# Altium PCB PCB2.PcbDoc (part 1 of 2)
Units mm, origin at the board's own origin, x right, y up, seen from the top; angles counter-clockwise.
Board outline 112.5 x 128.5 mm, 2 copper layers (Top Layer, Bottom Layer); 192 components, 158 nets, 643 pads, 146 vias.
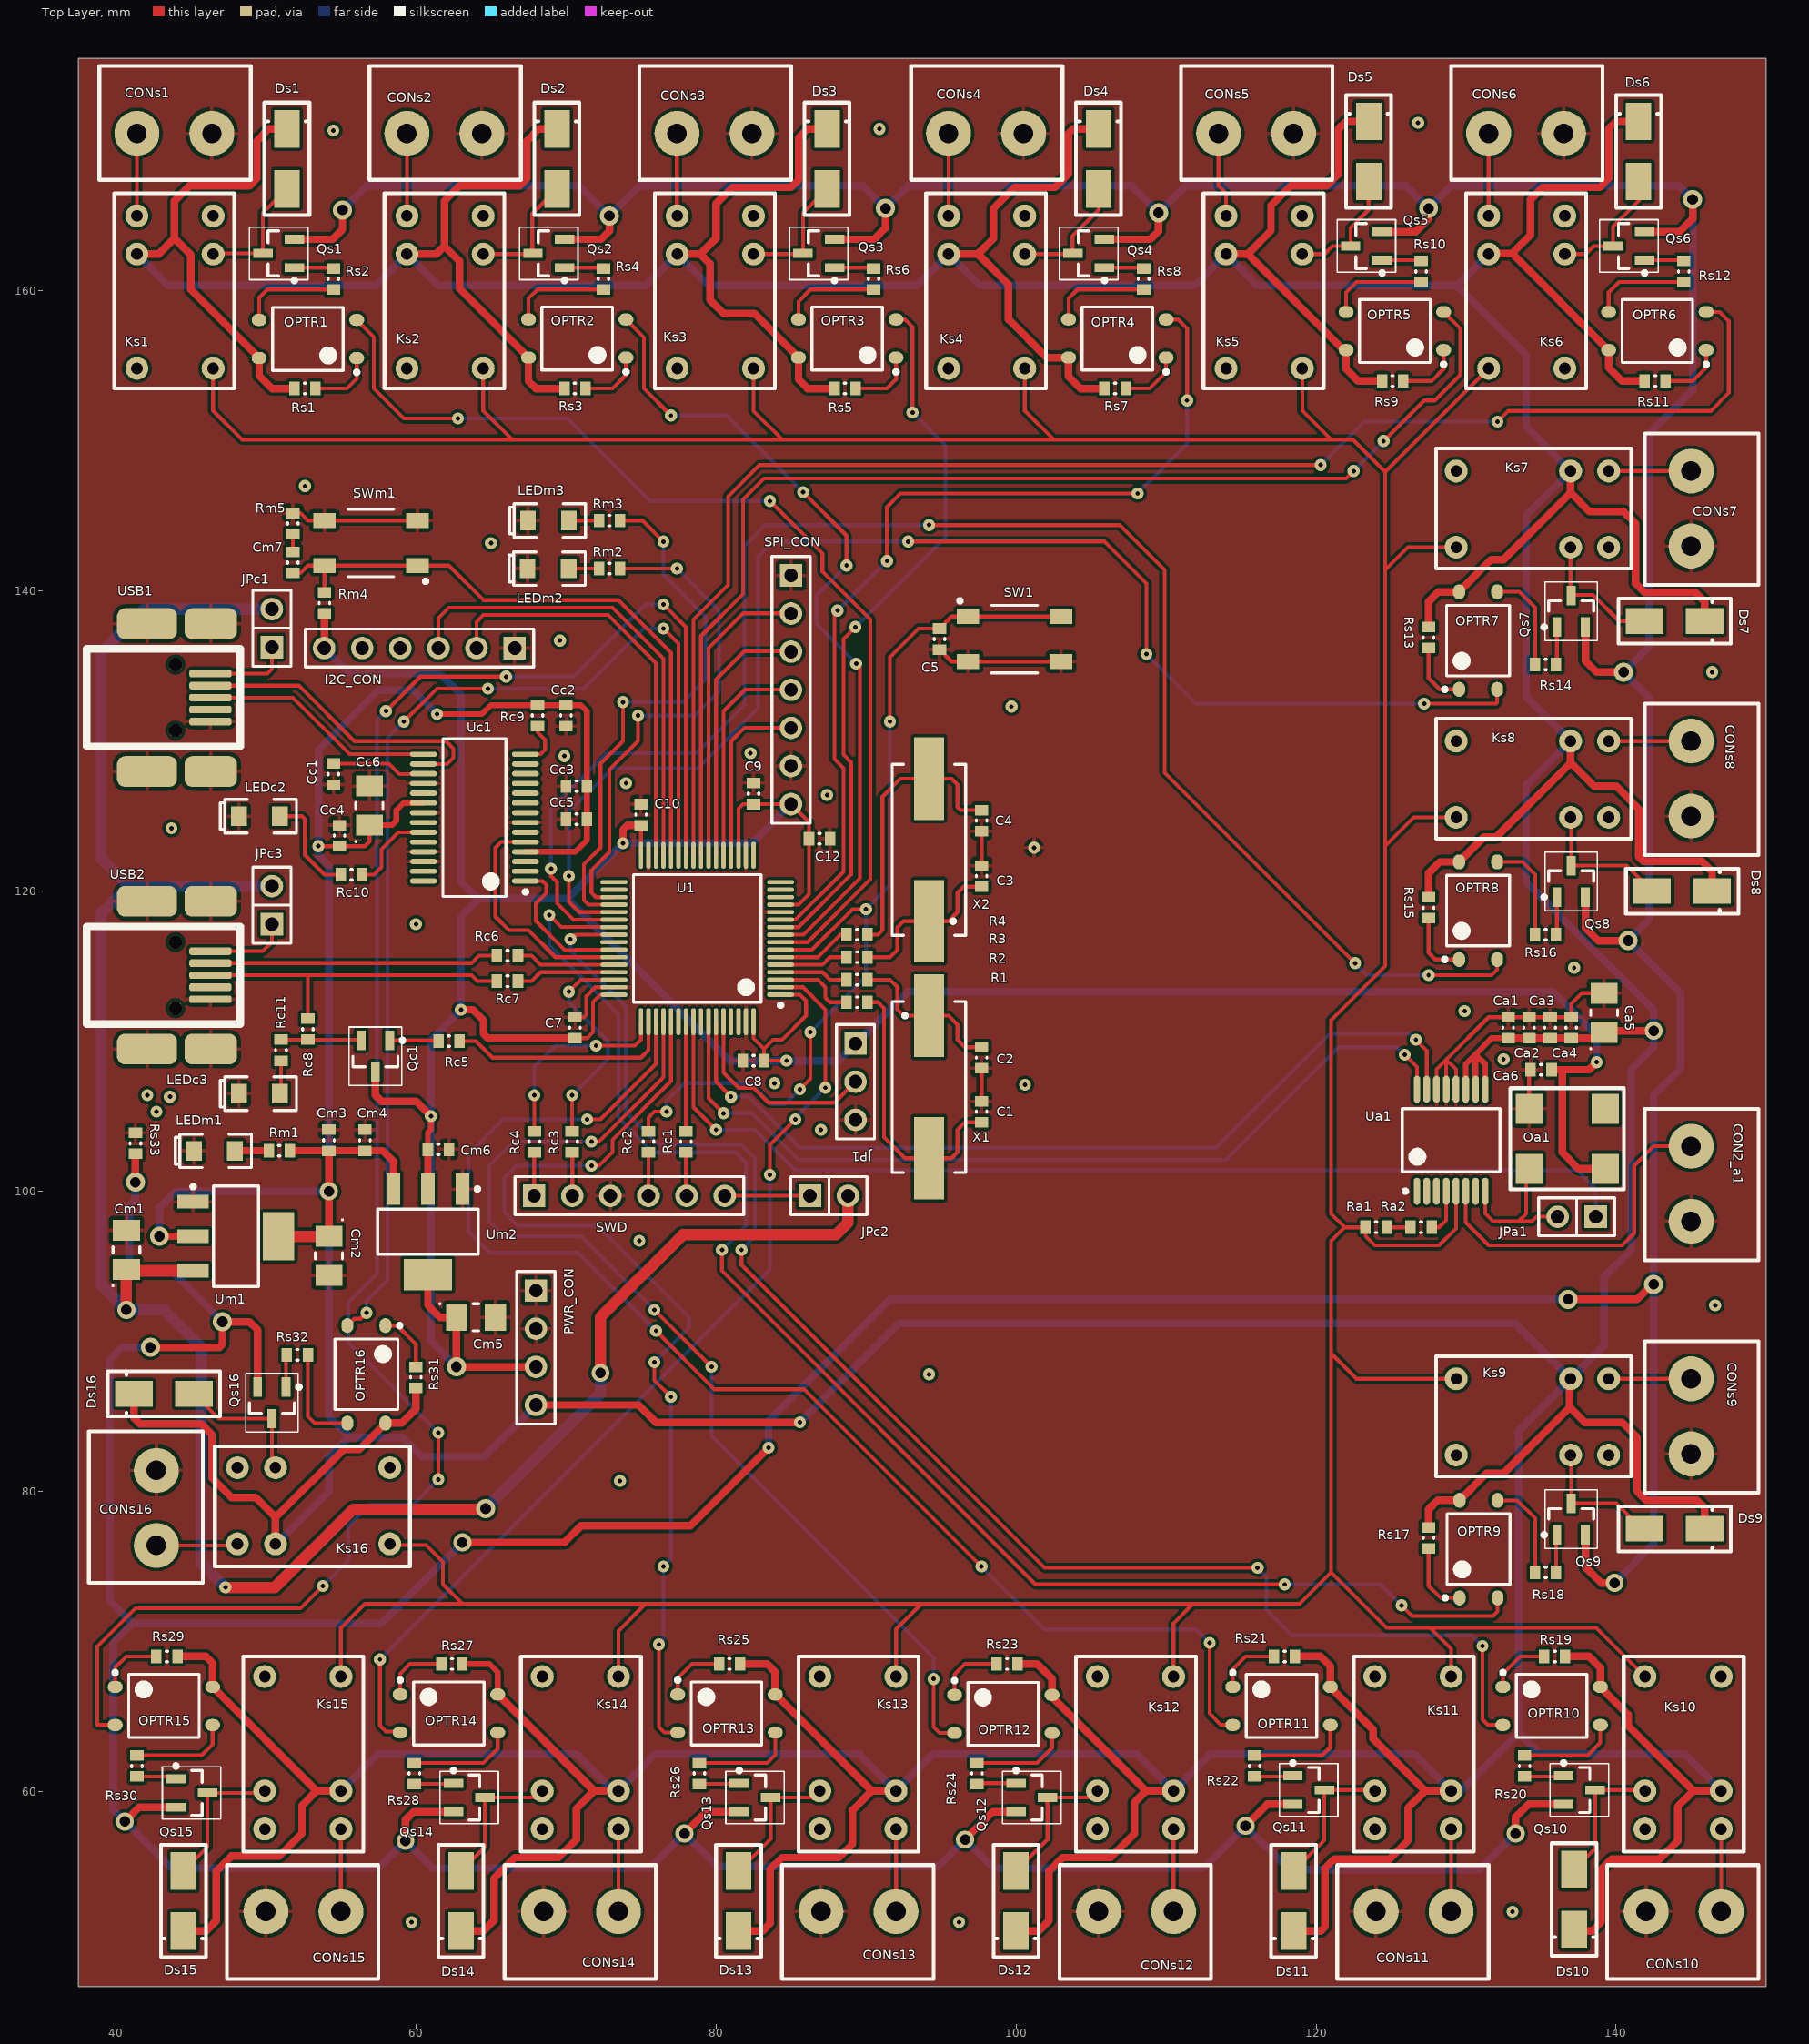
[diagram p0: Top Layer view]
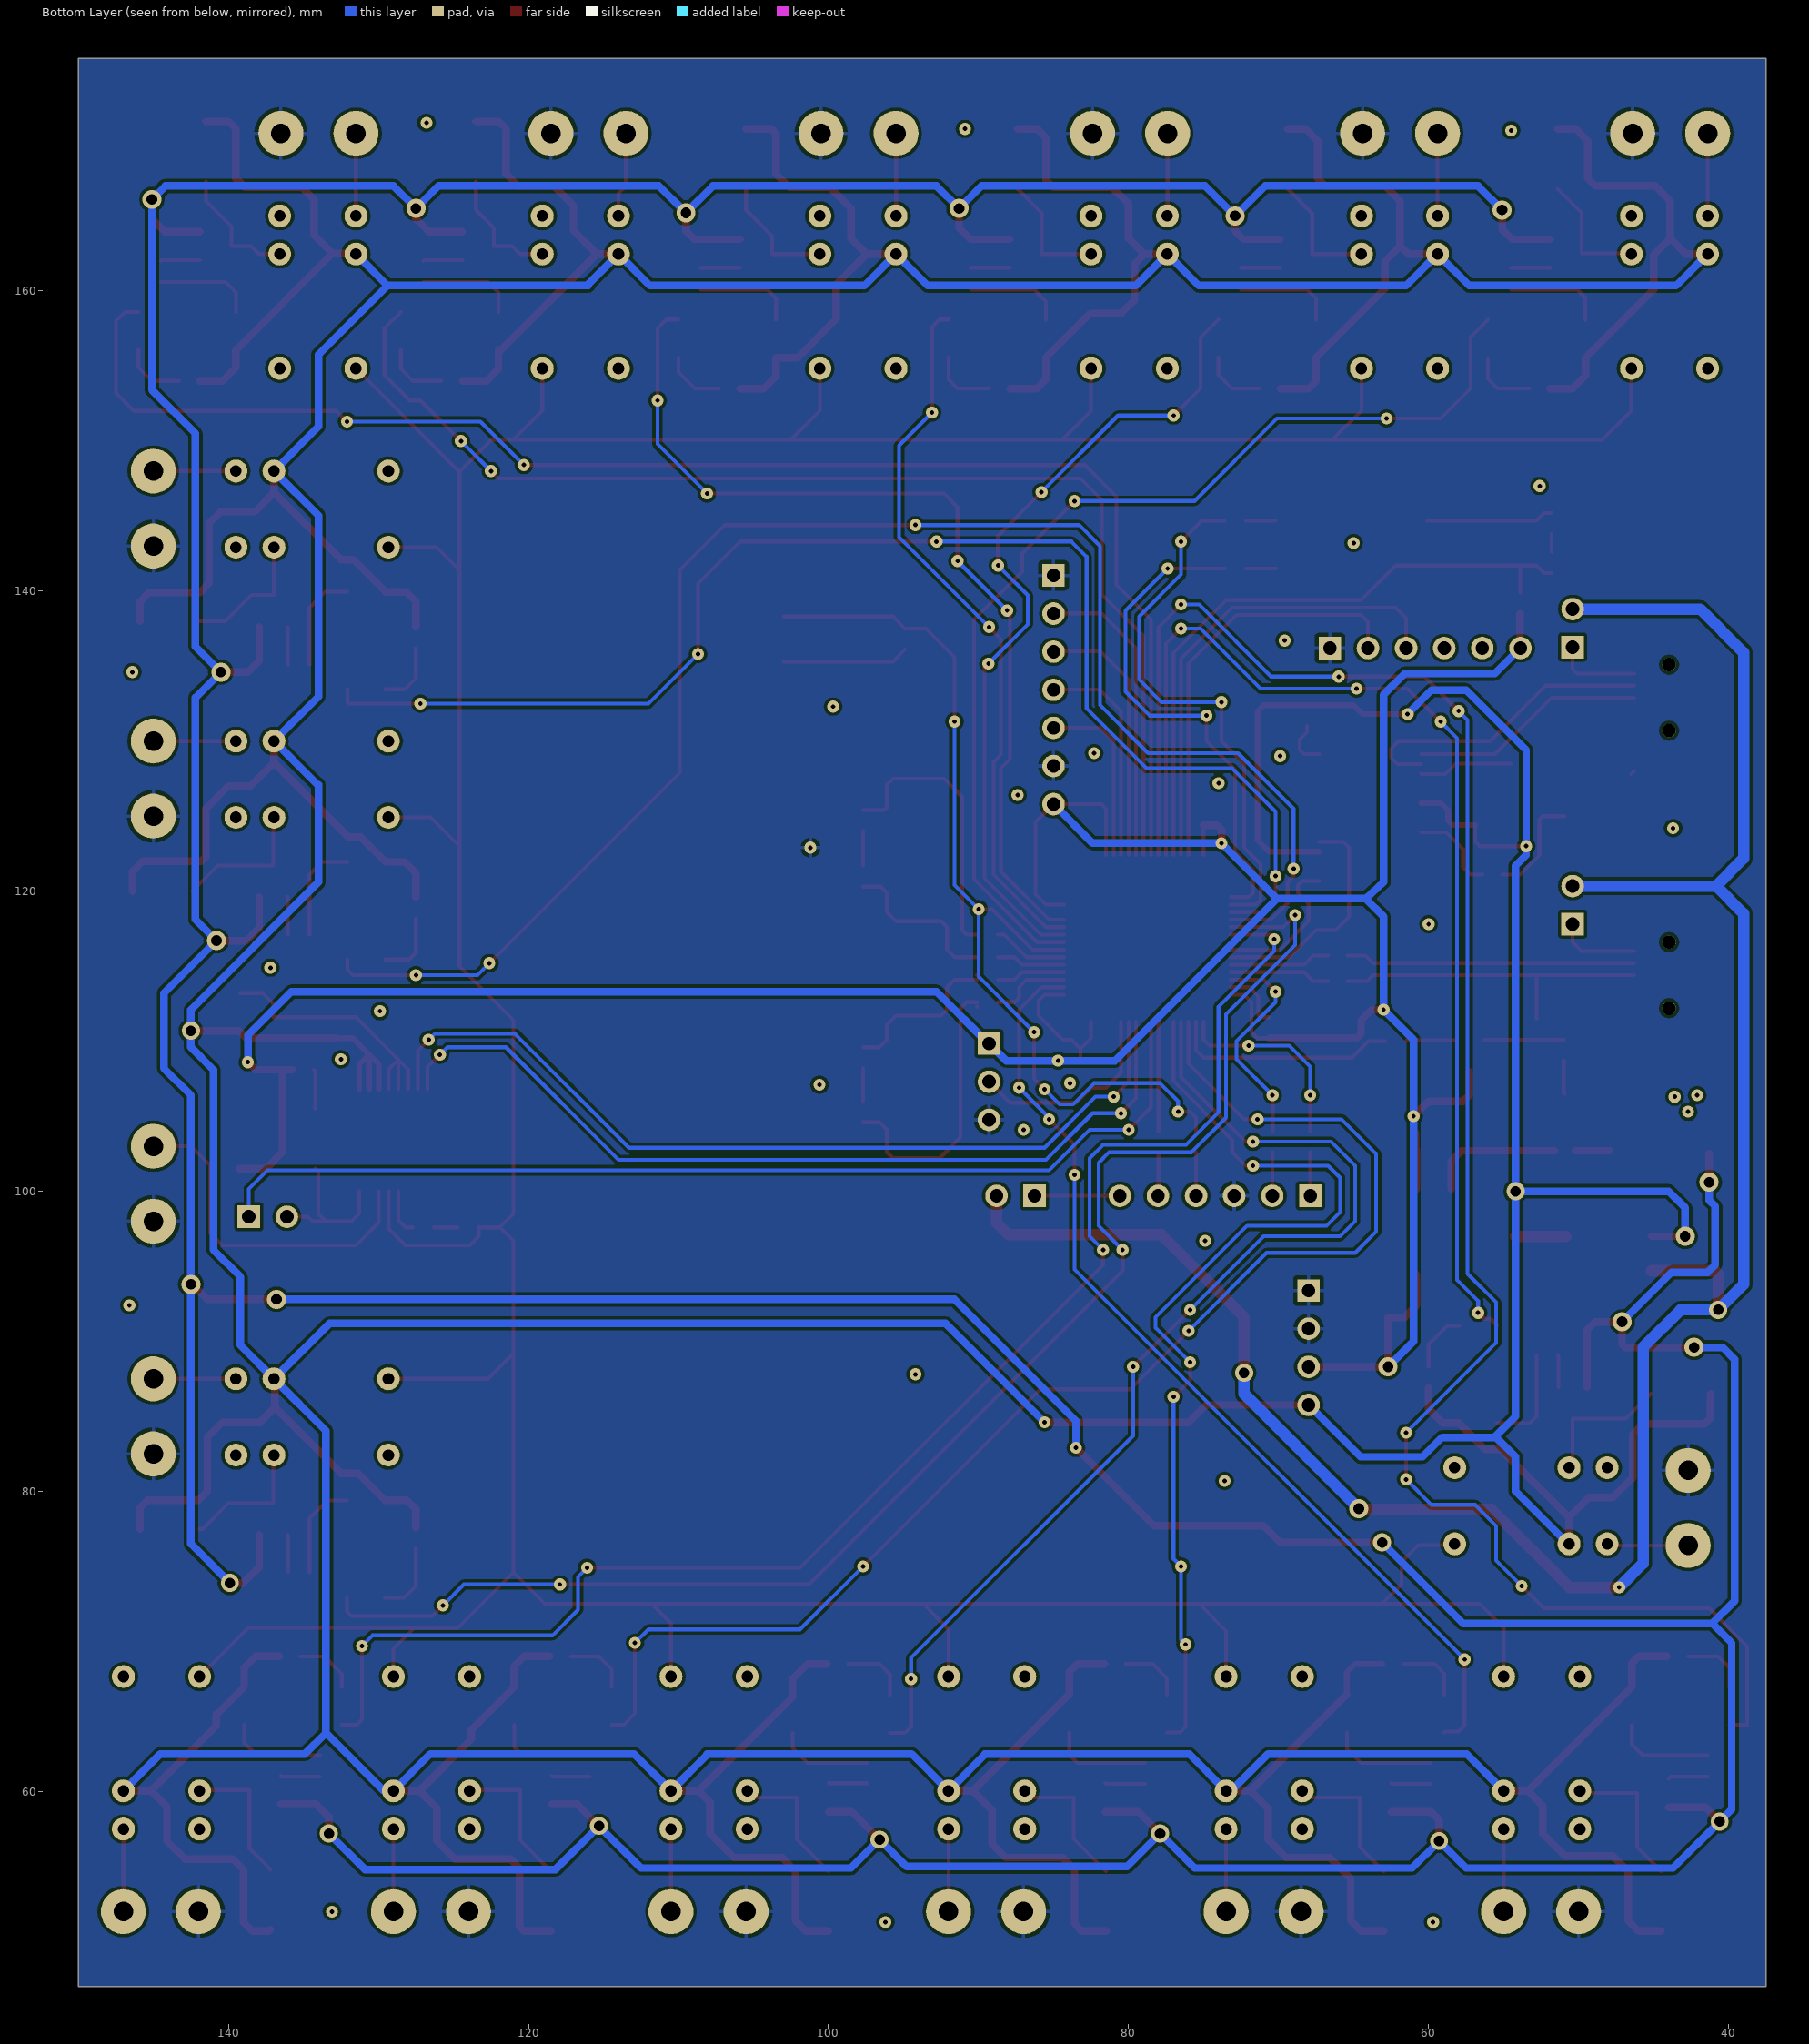
[diagram p1: Bottom Layer view, seen from below]

## Layer stack, top to bottom
Top Solder: solder mask 0.0102, Solder Resist, Dk 3.5
Top Layer: signal copper 0.0356
Dielectric 1: dielectric 0.32, FR-4, Dk 4.8
Bottom Layer: signal copper 0.0356
Bottom Solder: solder mask 0.0102, Solder Resist, Dk 3.5

## Board outline
37.5,47 150,47 150,175.5 37.5,175.5

## Design rules (kind name [scope] priority, off if disabled: settings)
Clearance [All] p1: gap=0.203 ignorepadtopadclearanceinfootprint=TRUE except(0: Arc-Hole Track-Hole SMDPad-SMDPad SMDPad-Hole THPad-Hole Via-Hole Fill-Hole Poly-Hole Region-Hole Text-Hole)
MinimumSolderMaskSliver [All] p1: minsoldermaskwidth=0.025
PolygonConnect [All] p1: connectstyle=Relief reliefconductorwidth=0.254 reliefentries=4 polygonreliefangle="90 Angle" airgapwidth=0.254
RoutingVias [All] p1: holewidth=0.7 width=1.2 viastyle="Through Hole" minholewidth=0.3 minwidth=0.8 maxholewidth=1.2 maxwidth=1.7
SilkToSolderMaskClearance [IsPad] p1: minsilkscreentomaskgap=0.127 clearancetoexposedcopper=TRUE
SolderMaskExpansion [All] p1: expansion=0.102
Width [All] p1: maxlimit=0.762 minlimit=0.254 preferedwidth=0.254
28 further rules are at their usual default settings.

## Classes and differential pairs
component class Analiser: Ca1 Ca2 Ca3 Ca4 Ca5 Ca6 CON2_a1 JPa1 Oa1 Ra1 Ra2 Ua1
component class Connectors: Cc1 Cc2 Cc3 Cc4 Cc5 Cc6 I2C_CON JPc1 JPc2 JPc3 LEDc2 LEDc3 PWR_CON Qc1 Rc1 Rc2 Rc3 Rc4 Rc5 Rc6 Rc7 Rc8 Rc9 Rc10 Rc11 SPI_CON SWD Uc1 USB1 USB2
component class MCU: C1 C2 C3 C4 C5 C7 C8 C9 C10 C12 JP1 R1 R2 R3 R4 SW1 U1 X1 X2
component class Misc: Cm1 Cm2 Cm3 Cm4 Cm5 Cm6 Cm7 LEDm1 LEDm2 LEDm3 Rm1 Rm2 Rm3 Rm4 Rm5 SWm1 Um1 Um2
component class Scanners: CONs1 CONs2 CONs3 CONs4 CONs5 CONs6 CONs7 CONs8 CONs9 CONs10 CONs11 CONs12 CONs13 CONs14 CONs15 CONs16 Ds1 Ds2 Ds3 Ds4 Ds5 Ds6 Ds7 Ds8 Ds9 Ds10 Ds11 Ds12 Ds13 Ds14 Ds15 Ds16 Ks1 Ks2 Ks3 Ks4 Ks5 Ks6 Ks7 Ks8 Ks9 Ks10 Ks11 Ks12 Ks13 Ks14 Ks15 Ks16 OPTR1 OPTR2 OPTR3 OPTR4 OPTR5 OPTR6 OPTR7 OPTR8 OPTR9 OPTR10 OPTR11 OPTR12 OPTR13 OPTR14 OPTR15 OPTR16 Qs1 Qs2 Qs3 Qs4 Qs5 Qs6 Qs7 Qs8 Qs9 Qs10 Qs11 Qs12 Qs13 Qs14 Qs15 Qs16 Rs1 Rs2 Rs3 Rs4 Rs5 Rs6 Rs7 Rs8 Rs9 Rs10 Rs11 Rs12 Rs13 Rs14 Rs15 Rs16 Rs17 Rs18 Rs19 Rs20 Rs21 Rs22 Rs23 Rs24 Rs25 Rs26 Rs27 Rs28 Rs29 Rs30 Rs31 Rs32 Rs33
net class PC[13..0]: PC0 PC1 PC2 PC3 PC4 PC5 PC6 PC7 PC8 PC9 PC10 PC11 PC12 PC13

## Components (designator, comment, footprint, x,y, rotation, side; value= is the part's Value field where it differs from the comment)
C1 "4.3p" CAPC0603(1608)100_L 97.7,105.3 r270 top
C2 "4.3p" CAPC0603(1608)100_L 97.7,108.9 r90 top
C3 "20pF" CAPC0603(1608)100_L 97.7,121 r270 top
C4 "20pF" CAPC0603(1608)100_L 97.7,124.7 r90 top
C5 "100n" CAPC0603(1608)100_L 94.9,136.8 r270 top
C7 "100n" CAPC0603(1608)100_L 70.6,110.9 r270 top
C8 "100n" CAPC0603(1608)100_L 82.5,108.7 r0 top
C9 "100n" CAPC0603(1608)100_L 82.5,126.5 r270 top
C10 "100n" CAPC0603(1608)100_L 75,125.1 r270 top
C12 "100n" CAPC0603(1608)100_L 86.9,123.5 r180 top
Ca1 "100n" CAPC0603(1608)100_L 132.8,110.9 r270 top
Ca2 "100n" CAPC0603(1608)100_L 134.2,110.9 r270 top
Ca3 "100n" CAPC0603(1608)100_L 135.6,110.9 r270 top
Ca4 "100n" CAPC0603(1608)100_L 137,110.9 r270 top
Ca5 "1uF" CAPMP3217X18-T_V 139.2,111.9 r90 top
Ca6 "0.1uF" CAPC0603(1608)100_L 135,108.1 r0 top
Cc1 "100n" CAPC0603(1608)100_L 54.5,127.8 r90 top
Cc2 "100n" CAPC0603(1608)100_L 70,131.7 r90 top
Cc3 "100n" CAPC0603(1608)100_L 70.7,127 r0 top
Cc4 "100n" CAPC0603(1608)100_L 54.9,123.7 r270 top
Cc5 "100n" CAPC0603(1608)100_L 70.7,124.8 r0 top
Cc6 "10uF" CAPMP3217X18-T_V 56.9,125.7 r90 top
Cm1 "10uF" CAPMP3217X18-T_V 40.7,96.1 r90 top
Cm2 "10uF" CAPMP3217X18-T_V 54.2,95.7 r270 top
Cm3 "1uF" CAPC0603(1608)100_L 54.2,103.4 r270 top
Cm4 "100n" CAPC0603(1608)100_L 56.6,103.4 r270 top
Cm5 "10uF" CAPMP3217X18-T_V 64,91.6 r0 top
Cm6 "100n" CAPC0603(1608)100_L 61.5,102.8 r180 top
Cm7 "100n" CAPC0603(1608)100_L 51.8,141.9 r270 top
CON2_a1 "ARK2" ARK2 141.9,105.5 r270 top
CONs1 "ARK2" ARK2 38.9,167.4 r0 top
CONs2 "ARK2" ARK2 56.9,167.4 r0 top
CONs3 "ARK2" ARK2 74.9,167.4 r0 top
CONs4 "ARK2" ARK2 93,167.4 r0 top
CONs5 "ARK2" ARK2 111,167.4 r0 top
CONs6 "ARK2" ARK2 129,167.4 r0 top
CONs7 "ARK2" ARK2 141.9,150.5 r270 top
CONs8 "ARK2" ARK2 141.9,132.5 r270 top
CONs9 "ARK2" ARK2 141.9,90 r270 top
CONs10 "ARK2" ARK2 149.5,55.1 r180 top
CONs11 "ARK2" ARK2 131.5,55.1 r180 top
CONs12 "ARK2" ARK2 113,55.1 r180 top
CONs13 "ARK2" ARK2 94.5,55.1 r180 top
CONs14 "ARK2" ARK2 76,55.1 r180 top
CONs15 "ARK2" ARK2 57.5,55.1 r180 top
CONs16 "ARK2" ARK2 45.8,73.9 r90 top
Ds1 "D Schottky" SMA 51.4,168.8 r90 top
Ds2 "D Schottky" SMA 69.4,168.8 r90 top
Ds3 "D Schottky" SMA 87.4,168.8 r90 top
Ds4 "D Schottky" SMA 105.5,168.8 r90 top
Ds5 "D Schottky" SMA 123.5,169.3 r90 top
Ds6 "D Schottky" SMA 141.5,169.3 r90 top
Ds7 "D Schottky" SMA 143.9,138 r0 top
Ds8 "D Schottky" SMA 144.4,120 r0 top
Ds9 "D Schottky" SMA 143.9,77.5 r0 top
Ds10 "D Schottky" SMA 137.2,52.8 r270 top
Ds11 "D Schottky" SMA 118.5,52.7 r270 top
Ds12 "D Schottky" SMA 100,52.7 r270 top
Ds13 "D Schottky" SMA 81.5,52.7 r270 top
Ds14 "D Schottky" SMA 63,52.7 r270 top
Ds15 "D Schottky" SMA 44.5,52.7 r270 top
Ds16 "D Schottky" SMA 43.2,86.5 r180 top
I2C_CON "HDR1X6" HDR1X6 66.58,136.2 r180 top
JP1 "HDR1X3" HDR1X3 89.3,109.84 r270 top
JPa1 "Jumper" "HDR1X2 - JP" 137.37,97.03 r180 top
JPc1 "Jumper" "HDR1X2 - JP" 49.13,137.53 r90 top
JPc2 "Jumper" "HDR1X2 - JP" 87.53,100.97 r0 top
JPc3 "Jumper" "HDR1X2 - JP" 49.13,119.07 r90 top
Ks1 "Relay-SPDT" Relay_m1 41.4,165 r0 top
Ks2 "Relay-SPDT" Relay_m1 59.4,165 r0 top
Ks3 "Relay-SPDT" Relay_m1 77.42,165 r0 top
Ks4 "Relay-SPDT" Relay_m1 95.5,165 r0 top
Ks5 "Relay-SPDT" Relay_m1 114,165 r0 top
Ks6 "Relay-SPDT" Relay_m1 131.5,165 r0 top
Ks7 "Relay-SPDT" Relay_m1 139.5,148 r270 top
Ks8 "Relay-SPDT" Relay_m1 139.5,130 r270 top
Ks9 "Relay-SPDT" Relay_m1 139.5,87.5 r270 top
Ks10 "Relay-SPDT" Relay_m1 147,57.5 r180 top
Ks11 "Relay-SPDT" Relay_m1 129,57.5 r180 top
Ks12 "Relay-SPDT" Relay_m1 110.5,57.5 r180 top
Ks13 "Relay-SPDT" Relay_m1 92,57.5 r180 top
Ks14 "Relay-SPDT" Relay_m1 73.5,57.5 r180 top
Ks15 "Relay-SPDT" Relay_m1 55,57.5 r180 top
Ks16 "Relay-SPDT" Relay_m1 48.1,76.5 r90 top
LEDc2 "RED" 0805_DIODE 51.058,125 r180 top
LEDc3 "RED" 0805_DIODE 51.058,106.5 r180 top
LEDm1 "RED" 0805_DIODE 48.058,102.7 r180 top
LEDm2 "RED" 0805_DIODE 70.3,141.5 r180 top
LEDm3 "RED" 0805_DIODE 70.327,144.7 r180 top
Oa1 "Clock Oscillator" "Oscillator SMD" 139.275,101.5 r180 top
OPTR1 "FODM121R2" "FAIR-MFP 4L_V" 52.8,156.8 r180 top
OPTR2 "FODM121R2" "FAIR-MFP 4L_V" 70.75,156.83 r180 top
OPTR3 "FODM121R2" "FAIR-MFP 4L_V" 88.75,156.83 r180 top
OPTR4 "FODM121R2" "FAIR-MFP 4L_V" 106.75,156.83 r180 top
OPTR5 "FODM121R2" "FAIR-MFP 4L_V" 125.25,157.33 r180 top
OPTR6 "FODM121R2" "FAIR-MFP 4L_V" 142.75,157.33 r180 top
OPTR7 "FODM121R2" "FAIR-MFP 4L_V" 130.8,136.7 r90 top
OPTR8 "FODM121R2" "FAIR-MFP 4L_V" 130.8,118.7 r90 top
OPTR9 "FODM121R2" "FAIR-MFP 4L_V" 130.83,76.15 r90 top
OPTR10 "FODM121R2" "FAIR-MFP 4L_V" 135.7,65.7 r0 top
OPTR11 "FODM121R2" "FAIR-MFP 4L_V" 117.7,65.7 r0 top
OPTR12 "FODM121R2" "FAIR-MFP 4L_V" 99.15,65.17 r0 top
OPTR13 "FODM121R2" "FAIR-MFP 4L_V" 80.7,65.2 r0 top
OPTR14 "FODM121R2" "FAIR-MFP 4L_V" 62.2,65.2 r0 top
OPTR15 "FODM121R2" "FAIR-MFP 4L_V" 43.2,65.7 r0 top
OPTR16 "FODM121R2" "FAIR-MFP 4L_V" 56.7,87.8 r270 top
PWR_CON "HDR1X4" HDR1X4 68,93.38 r270 top
Qc1 "BC817-25" SOT23_N 57.3,109 r270 top
Qs1 "BC817-25" SOT23_N 50.85,162.5 r180 top
Qs2 "BC817-25" SOT23_N 68.85,162.5 r180 top
Qs3 "BC817-25" SOT23_N 86.85,162.5 r180 top
Qs4 "BC817-25" SOT23_N 104.85,162.5 r180 top
Qs5 "BC817-25" SOT23_N 123.35,163 r180 top
Qs6 "BC817-25" SOT23_N 140.85,163 r180 top
Qs7 "BC817-25" SOT23_N 137,138.65 r90 top
Qs8 "BC817-25" SOT23_N 137,120.65 r90 top
Qs9 "BC817-25" SOT23_N 137,78.15 r90 top
Qs10 "BC817-25" SOT23_N 137.55,60.1 r0 top
Qs11 "BC817-25" SOT23_N 119.5,60.1 r0 top
Qs12 "BC817-25" SOT23_N 101.05,59.6 r0 top
Qs13 "BC817-25" SOT23_N 82.6,59.6 r0 top
Qs14 "BC817-25" SOT23_N 63.55,59.6 r0 top
Qs15 "BC817-25" SOT23_N 45.05,59.9 r0 top
Qs16 "BC817-25" SOT23_N 50.4,85.9 r270 top
R1 "0R" RESC0603(1608)_L 89.4,112.6 r180 top
R2 "0R" RESC0603(1608)_L 89.4,114.1 r180 top
R3 "0R" RESC0603(1608)_L 89.4,115.6 r180 top
R4 "0R" RESC0603(1608)_L 89.4,117.1 r180 top
Ra1 "2k" RESC0603(1608)_L 124,97.6 r0 top
Ra2 "0R" RESC0603(1608)_L 127,97.6 r0 top
Rc1 "0R" RESC0603(1608)_L 78,103.3 r90 top
Rc2 "0R" RESC0603(1608)_L 75.5,103.3 r90 top
Rc3 "0R" RESC0603(1608)_L 70.4,103.3 r90 top
Rc4 "0R" RESC0603(1608)_L 67.9,103.3 r90 top
Rc5 "3k3" RESC0603(1608)_L 62.2,110 r180 top
Rc6 "22R" RESC0603(1608)_L 66.1,115.7 r0 top
Rc7 "22R" RESC0603(1608)_L 66.1,114 r0 top
Rc8 "1k5" RESC0603(1608)_L 52.8,110.8 r270 top
Rc9 "10k" RESC0603(1608)_L 68.1,131.7 r270 top
Rc10 "3k3" RESC0603(1608)_L 55.7,121.1 r0 top
Rc11 "3k3" RESC0603(1608)_L 51,109.4 r90 top
Rm1 "RES0603" RESC0603(1608)_L 50.9,102.7 r0 top
Rm2 "3k3" RESC0603(1608)_L 72.9,141.5 r0 top
Rm3 "3k3" RESC0603(1608)_L 72.9,144.7 r0 top
Rm4 "4k7" RESC0603(1608)_L 53.9,139.2 r270 top
Rm5 "100R" RESC0603(1608)_L 51.8,144.5 r270 top
Rs1 "3k3" RESC0603(1608)_L 52.6,153.5 r180 top
Rs2 "10k" RESC0603(1608)_L 54.5,160.8 r90 top
Rs3 "3k3" RESC0603(1608)_L 70.6,153.5 r180 top
Rs4 "10k" RESC0603(1608)_L 72.5,160.8 r90 top
Rs5 "3k3" RESC0603(1608)_L 88.6,153.5 r180 top
Rs6 "10k" RESC0603(1608)_L 90.5,160.8 r90 top
Rs7 "3k3" RESC0603(1608)_L 106.6,153.5 r180 top
Rs8 "10k" RESC0603(1608)_L 108.5,160.8 r90 top
Rs9 "3k3" RESC0603(1608)_L 125.1,154 r180 top
Rs10 "10k" RESC0603(1608)_L 127,161.3 r90 top
Rs11 "3k3" RESC0603(1608)_L 142.6,154 r180 top
Rs12 "10k" RESC0603(1608)_L 144.5,161.3 r90 top
Rs13 "3k3" RESC0603(1608)_L 127.5,136.9 r90 top
Rs14 "10k" RESC0603(1608)_L 135.3,135.1 r0 top
Rs15 "3k3" RESC0603(1608)_L 127.5,118.9 r90 top
Rs16 "10k" RESC0603(1608)_L 135.3,117.1 r0 top
Rs17 "3k3" RESC0603(1608)_L 127.5,76.9 r90 top
Rs18 "10k" RESC0603(1608)_L 135.3,74.6 r0 top
Rs19 "3k3" RESC0603(1608)_L 135.9,69 r0 top
Rs20 "10k" RESC0603(1608)_L 133.9,61.7 r270 top
Rs21 "3k3" RESC0603(1608)_L 117.9,69 r0 top
Rs22 "10k" RESC0603(1608)_L 115.9,61.7 r270 top
Rs23 "3k3" RESC0603(1608)_L 99.4,68.5 r0 top
Rs24 "10k" RESC0603(1608)_L 97.4,61.2 r270 top
Rs25 "3k3" RESC0603(1608)_L 80.9,68.5 r0 top
Rs26 "10k" RESC0603(1608)_L 78.9,61.2 r270 top
Rs27 "3k3" RESC0603(1608)_L 62.4,68.5 r0 top
Rs28 "10k" RESC0603(1608)_L 59.9,61.2 r270 top
Rs29 "3k3" RESC0603(1608)_L 43.4,69 r0 top
Rs30 "10k" RESC0603(1608)_L 41.4,61.7 r270 top
Rs31 "3k3" RESC0603(1608)_L 60,87.6 r270 top
Rs32 "10k" RESC0603(1608)_L 52.1,89.1 r180 top
Rs33 "0R" RESC0603(1608)_L 41.3,103.2 r90 top
SPI_CON "HDR1X7" HDR1X7 85,141.04 r270 top
SW1 "TVCM01-038B" JNFU-TVCM01-038B_V 99.9,136.8 r0 top
SWD "HDR1X6" HDR1X6 67.88,99.7 r0 top
SWm1 "TVCM01-038B" JNFU-TVCM01-038B_V 57,143.2 r180 top
U1 "STM32F103RBT6TR" LQFP64_N 78.75,116.85 r180 top
Ua1 "AD5933YRSZ" ADI-RS-16_L 129,103.4 r90 top
Uc1 "FT232RL-Reel" SSOP-28_L 63.9,124.9 r180 top
Um1 "LD1117S50CTR" SOT-223_L 48,97 r0 top
Um2 "LD1117S33TR" SOT-223_L 60.8,97.3 r270 top
USB1 "67503-1020" MOLX-67503-1020_V 46.3,134.5 r0 top
USB2 "67503-1020" MOLX-67503-1020_V 46.3,116 r0 top
X1 "8MHz" HC49/4H_SMX 94.2,106.95 r270 top
X2 "8MHz" HC49/4H_SMX 94.2,122.75 r90 top

## Footprints (in the part's own frame and the unit in brackets; to place one, negate y for a bottom-side part, rotate by r counter-clockwise, add the part's x,y. Pads: shape width x height; smd on the part's side, far side on the other; paste and mask are expansions set on the pad)
0805_DIODE [mm]
  rect 1.05x1.3 smd: 1(0.127,0) 2(2.858,0)
  silkscreen extent -0.98,-1.12 4.09,1.12, body extent 0.41,-0.63 2.43,0.64, height 0.81
ADI-RS-16_L [mm] "SOP, 16-Leads, Body 6.2x5.3mm, Pitch 0.65mm, IPC High Density"
  oval 1.8x0.45 smd: 1(-3.4,2.275) 2(-3.4,1.625) 3(-3.4,0.975) 4(-3.4,0.325) 5(-3.4,-0.325) 6(-3.4,-0.975) 7(-3.4,-1.625) 8(-3.4,-2.275) 9(3.4,-2.275) 10(3.4,-1.625) 11(3.4,-0.975) 12(3.4,-0.325) 13(3.4,0.325) 14(3.4,0.975) 15(3.4,1.625) 16(3.4,2.275)
  silkscreen extent -3.52,-3.25 2.1,3.25, body extent -2.8,-3.25 2.8,3.25, height 2
ARK2 [mm]
  round 3 hole 1.3: 1(2.5,3.1) 2(7.5,3.1)
  silkscreen extent 0,0 10.1,7.6, body extent 0,0 10,7.6, height 10
CAPC0603(1608)100_L [mm]
  rect 0.7x0.9 smd: 1(-0.7,0) 2(0.7,0)
  silkscreen extent -0.05,-0.35 0.05,0.35, body extent -0.87,-0.47 0.88,0.48, height 1
CAPMP3217X18-T_V [mm] "Molded Capacitor, 2-Leads, Body 3.40x1.8mm"
  rect 1.4x1.8 smd: 1(-1.3,0) 2(1.3,0)
  silkscreen extent -2.45,-0.9 0.2,0.95, body extent -1.92,-0.9 1.92,0.9, height 1.8
"FAIR-MFP 4L_V" [mm] "SOP, 4-Leads, Body 4.2x4.6mm, Pitch 2.54mm"
  oval 1x0.8 smd: 1(-3.25,1.27) 2(-3.25,-1.27) 3(3.25,-1.27) 4(3.25,1.27)
  silkscreen extent -3.38,-2.1 2.35,2.34, body extent -3.39,-1.92 3.39,1.93, height 2.4
HC49/4H_SMX [mm]
  rect 5.5x2 smd: 1(-4.75,0) 2(4.75,0)
  silkscreen extent -5.7,-2.45 5.7,2.45, body extent -6.3,-2.3 6.2,2.35, height 3.9
"HDR1X2 - JP" [mm] "Connector; Header; 2 Position, Jumper"
  rect 1.5x1.5 hole 0.9: 1(-1.27,-1.27)
  round 1.5 hole 0.9: 2(1.27,-1.27)
  silkscreen extent -2.54,-2.54 2.54,0, body extent -2.54,-2.51 2.54,0.03, height 8.54
HDR1X3 [mm] "Connector; Header; 3 Position"
  rect 1.5x1.5 hole 0.9: 1(0,0)
  round 1.5 hole 0.9: 2(2.54,0) 3(5.08,0)
  silkscreen extent -1.27,-1.27 6.35,1.27, body extent -1.27,-1.24 6.35,1.3, height 8.54
HDR1X4 [mm] "Connector; Header; 4 Position"
  rect 1.5x1.5 hole 0.9: 1(0,0)
  round 1.5 hole 0.9: 2(2.54,0) 3(5.08,0) 4(7.62,0)
  silkscreen extent -1.27,-1.27 8.89,1.27, body extent -1.27,-1.27 8.89,1.27, height 8.54
HDR1X6 [mm] "Connector; Header; 6 Position"
  rect 1.5x1.5 hole 0.9: 1(0,0)
  round 1.5 hole 0.9: 2(2.54,0) 3(5.08,0) 4(7.62,0) 5(10.16,0) 6(12.7,0)
  silkscreen extent -1.27,-1.27 13.97,1.27, body extent -1.27,-1.27 13.97,1.27, height 8.54
HDR1X7 [mm] "Connector; Header; 7 Position"
  rect 1.5x1.5 hole 0.9: 1(0,0)
  round 1.5 hole 0.9: 2(2.54,0) 3(5.08,0) 4(7.62,0) 5(10.16,0) 6(12.7,0) 7(15.24,0)
  silkscreen extent -1.27,-1.27 16.51,1.27, body extent -1.27,-1.24 16.51,1.3, height 8.54
JNFU-TVCM01-038B_V [mm] "Surface Mount Switch, 4.5 x 4.5 mm Body"
  rect 1.5x1 smd: 1(-3.1,1.5) 2(3.1,1.5) 3(-3.1,-1.5) 4(3.1,-1.5)
  silkscreen extent -3.77,-2.25 1.52,2.67, body extent -2.25,-2.25 2.25,2.25, height 3.8
LQFP64_N [mm] "Thin QFP, 64-Leads, Body 10x10mm, Pitch 0.5mm, IPC Medium Density"
  oval 1.8x0.3 smd: 1(-5.55,3.75) 2(-5.55,3.25) 3(-5.55,2.75) 4(-5.55,2.25) 5(-5.55,1.75) 6(-5.55,1.25) 7(-5.55,0.75) 8(-5.55,0.25) 9(-5.55,-0.25) 10(-5.55,-0.75) 11(-5.55,-1.25) 12(-5.55,-1.75) 13(-5.55,-2.25) 14(-5.55,-2.75) 15(-5.55,-3.25) 16(-5.55,-3.75) 33(5.55,-3.75) 34(5.55,-3.25) 35(5.55,-2.75) 36(5.55,-2.25) 37(5.55,-1.75) 38(5.55,-1.25) 39(5.55,-0.75) 40(5.55,-0.25) 41(5.55,0.25) 42(5.55,0.75) 43(5.55,1.25) 44(5.55,1.75) 45(5.55,2.25) 46(5.55,2.75) 47(5.55,3.25) 48(5.55,3.75)
  oval 0.3x1.8 smd: 17(-3.75,-5.55) 18(-3.25,-5.55) 19(-2.75,-5.55) 20(-2.25,-5.55) 21(-1.75,-5.55) 22(-1.25,-5.55) 23(-0.75,-5.55) 24(-0.25,-5.55) 25(0.25,-5.55) 26(0.75,-5.55) 27(1.25,-5.55) 28(1.75,-5.55) 29(2.25,-5.55) 30(2.75,-5.55) 31(3.25,-5.55) 32(3.75,-5.55) 49(3.75,5.55) 50(3.25,5.55) 51(2.75,5.55) 52(2.25,5.55) 53(1.75,5.55) 54(1.25,5.55) 55(0.75,5.55) 56(0.25,5.55) 57(-0.25,5.55) 58(-0.75,5.55) 59(-1.25,5.55) 60(-1.75,5.55) 61(-2.25,5.55) 62(-2.75,5.55) 63(-3.25,5.55) 64(-3.75,5.55)
  silkscreen extent -5.68,-4.25 4.25,4.57, body extent -5,-5 5,5, height 1.6
MOLX-67503-1020_V [mm] "Mini USB Connector, SMT, Righer Angle"
  rrect50% 2.8x0.5 smd: 1(0,0) 2(0,-0.8) 3(0,-1.6) 4(0,-2.4) 5(0,-3.2)
  rrect50% 3.5x2.05 smd: 6(0.025,3.325) 8(0.025,-6.525)
  rrect50% 4x2.05 smd: 7(-4.225,3.325) 9(-4.225,-6.525)
  round 0.9 hole 0.9 unplated: X(-2.325,-3.8) Y(-2.325,0.6)
  silkscreen extent -8.25,-4.85 2,1.65, body extent -8.22,-6.56 0.78,3.34, height 3.95
"Oscillator SMD" [mm] "5x7mm 1.8MHz Crystal"
  rect 1.8x2 smd: 1(0,-4) 2(5.075,-4) 3(5.075,0) 4(0,0)
  silkscreen extent -1.25,-5.38 6.32,1.38
Relay_m1 [mil]
  round 60 hole 30: 1(0,-400) 1(200,-400) 2(200,0) 3(0,0) 4(0,-100) 5(200,-100)
  silkscreen extent -59,-453 256,59
RESC0603(1608)_L [mm]
  rect 0.7x0.9 smd: 1(-0.7,0) 2(0.7,0)
  silkscreen extent -0.05,-0.35 0.05,0.35, body extent -0.85,-0.47 0.85,0.47, height 0.6
SMA [mm] "Molded Diode, 2-Leads, Body 4,3x2,7mm, IPC Medium Density"
  rect 2.5x1.7 smd: 1(-2,0) 2(2,0)
  silkscreen extent -3.75,-1.5 3.75,1.5, body extent -2.6,-1.4 2.6,1.4, height 2.21
SOT23_N [mm]
  rect 1.3x0.6 smd: 1(-1.05,0.95) 2(-1.05,-0.95) 3(1.05,0)
  silkscreen extent -1.95,-1.75 1.95,1.93, body extent -1.6,-1.5 1.6,1.5, height 1.1
SOT-223_L [mm] "SOT223, 4-Leads, Body 6.5x3.5mm, Pitch 2.3mm, Lead Span 7mm, IPC High Density"
  rect 2.1x0.9 smd: 1(-2.85,2.3) 2(-2.85,0) 3(-2.85,-2.3)
  rect 2.1x3.2 smd: 4(2.85,0)
  silkscreen extent -2.97,-3.35 1.5,3.42, body extent -1.85,-3.35 1.85,3.35, height 1.8
SSOP-28_L [mm] "SOP, 28-Leads, Body 10.2x5.3mm, Pitch 0.65mm, IPC High Density"
  oval 1.8x0.35 smd: 1(-3.4,4.225) 2(-3.4,3.575) 3(-3.4,2.925) 4(-3.4,2.275) 5(-3.4,1.625) 6(-3.4,0.975) 7(-3.4,0.325) 8(-3.4,-0.325) 9(-3.4,-0.975) 10(-3.4,-1.625) 11(-3.4,-2.275) 12(-3.4,-2.925) 13(-3.4,-3.575) 14(-3.4,-4.225) 15(3.4,-4.225) 16(3.4,-3.575) 17(3.4,-2.925) 18(3.4,-2.275) 19(3.4,-1.625) 20(3.4,-0.975) 21(3.4,-0.325) 22(3.4,0.325) 23(3.4,0.975) 24(3.4,1.625) 25(3.4,2.275) 26(3.4,2.925) 27(3.4,3.575) 28(3.4,4.225)
  silkscreen extent -3.52,-5.25 2.1,5.25, body extent -2.8,-5.25 2.8,5.25, height 2

## Part data
C1 C2 C3 C4 C5 C7 C8 C9 C10 C12 Ca1 Ca2 Ca3 Ca4 Ca6 Cc1 Cc2 Cc3 Cc4 Cc5 Cm3 Cm4 Cm6 Cm7: library part CMP-1590-00005-1, "0603 (1608 Metric) Chip Capacitor", Case-EIA=0603, Case-Metric=1608, PackageReference=CAPC0603(1608)100
Ca5 Cc6 Cm1 Cm2 Cm5: library part CMP-1661-00003-1, "Standard Tantalum, 1 uF, +/- 10%, 35 V, -55 to 125 degC, 2-Pin SMD (1206), RoHS, Tape and Reel", Current Rating="200 mA", Max Operating Temperature="70 degC", Min Operating Temperature="-20 degC", Package Quantity=1000, Voltage Rating (DC)="30 V", ComponentLink1Description="Manufacturer URL", ComponentLink1URL=http://www.avx.com/, ComponentLink2Description=Datasheet, ComponentLink2URL=http://datasheets.avx.com/TAJ.pdf, ComponentLink3Description="Package Specification", ComponentLink3URL=http://www.avx.com/download/software/literature/AVX-Footprint-Library.pdf, Contact Finish=Silver, Contact Material=Copper, Contact Plating=Silver, DatasheetVersion=Feb-16, Height="7.4 mm", Length="11.6 mm", Mount="Through Hole", PackageDescription="2-Pin Surface Mount Device, Body 3.2 x 1.65 mm", PackageReference=CAPMP3217X18-T, Packaging=Bulk, Pins=3, REACH SVHC="No SVHC", RoHSCompliant=true, Width="4 mm"
CON2_a1 CONs1 CONs2 CONs3 CONs4 CONs5 CONs6 CONs7 CONs8 CONs9 CONs10 CONs11 CONs12 CONs13 CONs14 CONs15 CONs16: "Z彻cze 渞ubowe 2 piny"
Ds1 Ds2 Ds3 Ds4 Ds5 Ds6 Ds7 Ds8 Ds9 Ds10 Ds11 Ds12 Ds13 Ds14 Ds15 Ds16: "Schottky Diode", Code_JEDEC=DO-214-AA, LatestRevisionDate=17-Jul-2002, LatestRevisionNote="Re-released for DXP Platform.", PackageDescription="DO-214-AA/SMB; 2 C-Bend Leads; Body 5.3 x 3.6 mm, inc. leads (LxW)", PackageReference=SMB, Published=8-Jun-2000, Publisher="Altium Limited"
I2C_CON SWD: "Header, 6-Pin", LatestRevisionDate=17-Jul-2002, LatestRevisionNote="Re-released for DXP Platform.", Publisher="Altium Limited"
JP1: "Header, 3-Pin", LatestRevisionDate=17-Jul-2002, LatestRevisionNote="Re-released for DXP Platform.", Publisher="Altium Limited"
JPa1 JPc1 JPc2 JPc3: library part Jumper_2, "Jumper, 2-Pin"
Ks1 Ks2 Ks3 Ks4 Ks5 Ks6 Ks7 Ks8 Ks9 Ks10 Ks11 Ks12 Ks13 Ks14 Ks15 Ks16: "Single-Pole Dual-Throw Relay", LatestRevisionDate=17-Jul-2002, LatestRevisionNote="Re-released for DXP Platform.", PackageReference=MODULE5B, Published=24-Mar-1999, Publisher="Altium Limited"
LEDc2 LEDc3 LEDm1 LEDm2 LEDm3: library part LED, "Light-emitting diode", COLOR=RED
Oa1: "1.8MHz Clock Source SMD"
OPTR1 OPTR2 OPTR3 OPTR4 OPTR5 OPTR6 OPTR7 OPTR8 OPTR9 OPTR10 OPTR11 OPTR12 OPTR13 OPTR14 OPTR15 OPTR16: library part CMP-1569-00003-1, "Transistor Output Optocoupler, 1 to 1.3 V, -40 to 110 degC, 4-Pin SOP (MFP 4L), RoHS, Tape and Reel", Forward Voltage Max="1.3 V", Forward Voltage Min="1 V", PartNumber=FODM121, Temperature Max="110 degC", Temperature Min="-40 degC", ComponentLink1Description="Manufacturer URL", ComponentLink1URL=https://www.fairchildsemi.com/, ComponentLink2Description=Datasheet, ComponentLink2URL=https://www.fairchildsemi.com/datasheets/FO/FODM121.pdf, ComponentLink3Description="Package Specification", ComponentLink3URL=https://www.fairchildsemi.com/package-drawings/MF/MFP04C.pdf, DatasheetVersion="Rev. 1.1.4", Mounting Technology="Surface Mount", PackageDescription="4-Pin Mini Flat Package, Body 3.85 x 4.4 mm, Pitch 2.54 mm", Packing="Tape and Reel", RoHS=TRUE, VCE Saturation Max="0.4 V"
PWR_CON: "Header, 4-Pin", LatestRevisionDate=17-Jul-2002, LatestRevisionNote="Re-released for DXP Platform.", Publisher="Altium Limited"
Qc1 Qs1 Qs2 Qs3 Qs4 Qs5 Qs6 Qs7 Qs8 Qs9 Qs10 Qs11 Qs12 Qs13 Qs14 Qs15 Qs16: "NPN General-purpose Transistor", ComponentLink1Description="Manufacturer Link", ComponentLink1URL=http://www.semiconductors.philips.com/, ComponentLink2Description=Datasheet, ComponentLink2URL=http://www.semiconductors.philips.com/acrobat/datasheets/BC817_BC817W_BC337_5.pdf, DatasheetVersion=Jun-1999, LatestRevisionDate=12-Dec-2006, LatestRevisionNote="IPC-7351 Footprint Added.", PackageDescription="3-Pin SOT-23 Package 0.95 mm Pitch, 2.3 mm Lead Span", PackageReference=SOT23, PackageVersion=May-1999, Published=17-Sep-2003, Publisher="Altium Limited"
R1 R2 R3 R4 Ra1 Ra2 Rc1 Rc2 Rc3 Rc4 Rc5 Rc6 Rc7 Rc8 Rc9 Rc10 Rc11 Rm1 Rm2 Rm3 Rm4 Rm5 Rs1 Rs2 Rs3 Rs4 Rs5 Rs6 Rs7 Rs8 Rs9 Rs10 Rs11 Rs12 Rs13 Rs14 Rs15 Rs16 Rs17 Rs18 Rs19 Rs20 Rs21 Rs22 Rs23 Rs24 Rs25 Rs26 Rs27 Rs28 Rs29 Rs30 Rs31 Rs32 Rs33: library part CMP-1591-00001-1, "0603 (1608 Metric) Chip Resistor", Case-EIA=0603, Case-Metric=1608, PackageReference=RESC0603(1608)
SPI_CON: "Header, 7-Pin", LatestRevisionDate=17-Jul-2002, LatestRevisionNote="Re-released for DXP Platform.", Publisher="Altium Limited"
SW1 SWm1: library part CMP-0224-00001-1, "Switch, Push Button, 50 mA, 12V DC, SMD", Case Size="4.5 x 4.5", Operating Temperature="-30 to 85 degC", ComponentLink1Description="Manufacturer URL", ComponentLink1URL=http://www.jian-fu.com/, ComponentLink2Description=Datasheet, ComponentLink2URL=http://www.jian-fu.com/product-61.html, Mechanical Life="100,000 cycles", Mounting Technology="Suface Mount", PackageDescription="4-Pin Surface Mount Switch, 4.5 x 4.5 mm Body", PackageReference=TVCM01-038B, PartNumber=TVCM01-038B
U1: library part CMP-0237-00169-1, "STM32 ARM-based 32-bit MCU Performance Line with 128 kB Flash, 20 kB Internal RAM, -40 to +85癈 Temperature, 64-Pin LQFP, Tape and Reel", ComponentLink1Description="STM32F103 Datasheet", ComponentLink1URL=http://www.st.com/internet/com/TECHNICAL_RESOURCES/TECHNICAL_LITERATURE/DATASHEET/CD00161566.pdf, ComponentLink2Description="STM32 Family Web Page", ComponentLink2URL=www.st.com/stm32, ComponentLink3Description="st.com Home", ComponentLink3URL=http://www.st.com/internet/com/home/home.jsp, DatasheetVersion="rev13.0, Apr-2011", PackageDescription="64-Pin Low-Profile Quad Flat Pack, 10 x 10 mm Body, 0.5 mm Pitch (LQFP64)", PackageReference=LQFP64, PackageVersion="rev13, Apr-2011"
Ua1: library part CMP-0293-00046-1, "1 MSPS, 12-Bit Impedance Converter, Network Analyzer, Serial, RS-16, 77 Tube, Pb-Free", Code_JEDEC=MO-150-AC, ComponentLink1Description="Manufacturer URL", ComponentLink1URL=www.analog.com, ComponentLink2Description=Datasheet, ComponentLink2URL=http://www.analog.com/static/imported-files/data_sheets/AD5933.pdf, ComponentLink3Description="Package Specification", ComponentLink3URL=http://www.analog.com/static/imported-files/packages/31572257652246RS_16.pdf, DatasheetVersion="Rev. D", I/O Interface=Serial, I Supply total (max)=15mA, Master fclk=16.776MHz, PackageDescription="16-Lead Shrink Small Outline Package [SSOP]", PackageReference=RS-16, PackageVersion=3/17/2005, Resolution (Bits)=12bit, Tuning Word Width (bits)=27bit
Uc1: library part CMP-0078-00029-3, "USB UART Asynchronous Serial Data Transfer Chip, 28-pin SSOP, Tape and Reel", Manufacturer=FTDI, ComponentLink1Description="Manufacturer URL", ComponentLink1URL=http://www.ftdichip.com/, ComponentLink2Description=Datasheet, ComponentLink2URL=http://www.ftdichip.com/Support/Documents/DataSheets/ICs/DS_FT232R.pdf, DatasheetVersion="ver 2.10, Mar-2012", PackageDescription="28-Pin Small Outline Package 0.65 mm Pitch", PackageReference=SSOP-28, PackageVersion=Mar-12, PartNumber=FT232RL-Reel, RevisionNote="DatasheetVersion updated to 2.10 Mar-2012"
Um1: library part CMP-0244-00311-1, "Fixed Low Drop Positive Voltage Regulator, 5V, 4-Pin SOT-223, Tape and Reel", ComponentLink1Description="Manufacturer URL", ComponentLink1URL=http://www.st.com, ComponentLink2Description=Datasheet, ComponentLink2URL=http://www.st.com/internet/com/TECHNICAL_RESOURCES/TECHNICAL_LITERATURE/DATASHEET/CD00000544.pdf, DatasheetVersion=1/11/2011, PackageDescription="4-Pin SOT-223 Package, 6.5 x 3.5 mm Body, 2.3 mm Pitch, 7 mm Lead Span", PackageReference=SOT-223, PackageVersion=2010
Um2: library part CMP-0244-00310-1, "Fixed Low Drop Positive Voltage Regulator, 3.3V, 4-Pin SOT-223, Tape and Reel", ComponentLink1Description="Manufacturer URL", ComponentLink1URL=http://www.st.com, ComponentLink2Description=Datasheet, ComponentLink2URL=http://www.st.com/internet/com/TECHNICAL_RESOURCES/TECHNICAL_LITERATURE/DATASHEET/CD00000544.pdf, DatasheetVersion=1/11/2011, PackageDescription="4-Pin SOT-223 Package, 6.5 x 3.5 mm Body, 2.3 mm Pitch, 7 mm Lead Span", PackageReference=SOT-223, PackageVersion=2010
USB1 USB2: library part CMP-0411-00002-1, "USB, MINI, SMD, RA KME04-USBMU03A01", Manufacturer=Molex, ComponentLink1Description="Manufacturer URL", ComponentLink1URL=http://www.molex.com/, ComponentLink2Description=Datasheet, ComponentLink2URL=http://www.molex.com/pdm_docs/sd/675031020_sd.pdf, DatasheetVersion="Rev F, 06/2009", Mounting Technology="Surface Mount", PackageDescription="Mini USB Connector, SMT, Righer Angle", PackageReference=67503-1020, PartNumber=67503-1020, Terminal Pitch="0.8 mm"
X1 X2: library part XTAL, "Oscillator"

## Via types
v1: diameter 0.8, hole 0.3, Top Layer to Bottom Layer, 118 vias
v2: diameter 1.27, hole 0.711, Top Layer to Bottom Layer, 16 vias
v3: diameter 1.2, hole 0.7, Top Layer to Bottom Layer, 12 vias

## Nets (pads, with @x,y where several pads share a name; then routed paths per layer and width w, separated by ;. In a path a pad name is that pad's centre, name@x,y a point inside that pad or via, vN(x,y) a via of type N, cw(c..) or ccw(c..) an arc to the next point about the centre after c; other vN are vias at no path point)
3.3V: C7.2 C8.2 C9.2 C10.2 C12.2 Ca6.2 Cm5.1 Cm6.2 I2C_CON.6 JP1.1 Oa1.4 PWR_CON.3 Qc1.3 Rm4.2 SPI_CON.7 U1.1 U1.13 U1.19 U1.32 U1.48 U1.64 Um2.2 Um2.4 | length 242.2
  Top Layer w0.254: C7.2@70.6,110.2 71.4,110.2 71.803,110.603 71.803,112.603 72.3,113.1 U1.48@73.2,113.1 ; U1.32@75,122.4 C10.2@75,124.4 ; U1.19@81.5,122.4 81.5,125.5 81.8,125.8 C9.2@82.5,125.8 SPI_CON.7@85,125.8 ; U1.64@82.5,111.3 82.5,110.2 83.2,109.5 ; U1.1@84.3,113.1 85.6,113.1 86,112.7 86,111.7 84.4,110.1 83.8,110.1 83.2,109.5 ; U1.13@84.3,119.1 85.5,119.1 86.2,119.8 C12.2@86.2,123.5 86.2,124.6 SPI_CON.7@85,125.8 ; v1(84.7,108.7) C8.2@83.2,108.7 83.2,109.5 ; SPI_CON.7@84.98,125.82 SPI_CON.7@85,125.8
  Top Layer w0.381: Cm6.2@60.8,102.8 60.8,103.9 61,104.1 v1(61,105)
  Top Layer w0.508: I2C_CON.6@53.88,136.2 53.9,136.22 Rm4.2@53.9,138.5 ; Qc1.3@57.3,107.95 57.3,106.4 57.7,106 60,106 v1(61,105) ; Um2.4@60.8,94.45 60.8,92.4 61.6,91.6 Cm5.1@62.7,91.6 v2(62.7,88.3) PWR_CON.3@68,88.3 ; Um2.2@60.8,100.15 Cm6.2@60.8,102.8 ; v1(63,112.1) 63.8,112.1 64.5,111.4 64.5,110.5 64.8,110.2 69.1,110.2 C7.2@70.6,110.2 ; v1(73.8,123.2) 73.8,124.1 74.1,124.4 C10.2@75,124.4 ; Ca6.2@135.7,108.1 136.4,108.1 ; v1(138.7,108.6) 138.2,108.1 136.4,108.1 ; Oa1.4@139.275,101.5 137.5,101.5 136.4,102.6 136.4,108.1
  Bottom Layer w0.508: I2C_CON.6@53.88,136.2 55.58,134.5 61.6,134.5 63,133.1 63,120.6 64.2,119.5 ; v2(62.7,88.3) 61,90 v1(61,105) 61,110.1 v1(63,112.1) 63,118.3 64.2,119.5 ; SPI_CON.7@85,125.8 82.4,123.2 v1(73.8,123.2) 70.1,119.5 ; JP1.1@88.8,109.78 89.28,109.78 92.8,113.3 135.8,113.3 138.7,110.4 v1(138.7,108.6) ; JP1.1@89.3,109.84 88.16,108.7 v1(84.7,108.7) 80.9,108.7 70.1,119.5 ; 64.2,119.5 70.1,119.5
5V: Ca1.2 Ca2.2 Ca3.2 Ca4.2 Ca5.1 Cc2.2 Cc3.2 Cc4.2 Cc5.2 Cc6.1 Cm2.1 Cm3.2 Cm4.2 Ds1.2 Ds2.2 Ds3.2 Ds4.2 Ds5.2 Ds6.2 Ds7.2 Ds8.2 Ds9.2 Ds10.2 Ds11.2 Ds12.2 Ds13.2 Ds14.2 Ds15.2 Ds16.2 Ks1.4 Ks2.4 Ks3.4 Ks4.4 Ks5.4 Ks6.4 Ks7.4 Ks8.4 Ks9.4 Ks10.4 Ks11.4 Ks12.4 Ks13.4 Ks14.4 Ks15.4 Ks16.4 OPTR1.4 OPTR2.4 OPTR3.4 OPTR4.4 OPTR5.4 OPTR6.4 OPTR7.4 OPTR8.4 OPTR9.4 OPTR10.4 OPTR11.4 OPTR12.4 OPTR13.4 OPTR14.4 OPTR15.4 OPTR16.4 PWR_CON.4 Rc9.1 Rm1.2 Rs1.2 Rs3.2 Rs5.2 Rs7.2 Rs9.2 Rs11.2 Rs13.2 Rs15.2 Rs17.2 Rs19.2 Rs21.2 Rs23.2 Rs25.2 Rs27.2 Rs29.2 Rs31.2 Ua1.9 Ua1.10 Ua1.11 Uc1.4 Uc1.20 Um1.2 Um1.4 Um2.3 | length 1044.7
  Top Layer w0.254: v1(53.5,123) Cc4.2@54.9,123 56.6,123 56.9,123.3 Cc6.1@56.9,124.4 ; Ca5.1@139.2,110.6 Ca5.1@139.3,110.7
  Top Layer w0.381: Cc6.1@56.9,124.4 58.4,124.4 58.7,124.7 58.7,125.4 59.175,125.875 Uc1.20@60.5,125.875 ; v1(61.4,131.8) 64.4,131.8 65,132.4 Rc9.1@68.1,132.4 Cc2.2@70,132.4 71,132.4 71.4,132 Cc3.2@71.4,127 Cc5.2@71.4,124.8 71.4,123.4 70.625,122.625 Uc1.4@67.3,122.625 ; Rs27.2@63.1,68.5 64.9,68.5 65.45,67.95 OPTR14.4@65.45,66.47 ; Ua1.11@129.975,106.8 129.975,108.475 130.625,109.125 ; Ua1.10@130.625,106.8 130.625,109.125 ; Ua1.9@131.275,106.8 131.275,108.475 130.625,109.125 ; Ca1.2@132.8,110.2 131.7,110.2 130.625,109.125
  Top Layer w0.508: Ds16.2@41.2,86.5 41.2,84.9 41.6,84.5 45.7,84.5 46.4,83.8 46.4,80.9 47.7,79.6 49.3,79.6 50.64,78.26 ; Ks1.4@41.4,162.46 42.86,162.46 43.9,163.5 ; v2(42.9,97) Um1.2@45.15,97 ; Rs29.2@44.1,69 46,69 46.45,68.55 OPTR15.4@46.45,66.97 53.38,60.04 ; Ds15.2@44.5,50.7 46,50.7 46.7,51.4 46.7,54.7 47.7,55.7 50.9,55.7 52.4,57.2 52.4,59.06 53.38,60.04 ; Ks16.4@50.64,76.5 50.64,78.26 ; Ds1.2@51.4,170.8 50.2,170.8 49.4,170 49.4,167.5 48.9,167 44.9,167 43.9,166 43.9,163.5 ; Rm1.2@51.6,102.7 Cm3.2@54.2,102.7 ; Rs1.2@51.9,153.5 50.4,153.5 49.55,154.35 OPTR1.4@49.55,155.53 45,160.08 45,162.4 43.9,163.5 ; Cm2.1@54.2,97 v3(54.2,100) Cm3.2@54.2,102.7 ; Ks15.4@55,60.04 53.38,60.04 ; Um2.3@58.5,100.15 58.5,102 57.8,102.7 Cm4.2@56.6,102.7 Cm3.2@54.2,102.7 ; Ks2.4@59.4,162.46 61.36,162.46 61.9,163 ; Rs31.2@60,86.9 60,85.5 59.05,84.55 OPTR16.4@57.97,84.55 56.22,82.8 55.18,82.8 50.64,78.26 ; Ds14.2@63,50.7 64.5,50.7 65.2,51.4 65.2,54.2 66.6,55.6 69.5,55.6 70.7,56.8 70.7,58.86 71.88,60.04 ; OPTR14.4@65.45,66.47 71.88,60.04 ; PWR_CON.4@68,85.76 74.84,85.76 76,84.6 v1(85.6,84.6) ; Ds2.2@69.4,170.8 68.2,170.8 67.4,170 67.4,167.5 66.9,167 62.9,167 61.9,166 61.9,163 ; Rs3.2@69.9,153.5 68,153.5 67.5,154 OPTR2.4@67.5,155.56 62.9,160.16 62.9,162 61.9,163 ; Ks14.4@73.5,60.04 71.88,60.04 ; Ks3.4@77.42,162.46 78.96,162.46 ; Ds13.2@81.5,50.7 83.1,50.7 83.6,51.2 83.6,54.8 84.4,55.6 88.2,55.6 89.1,56.5 89.1,58.76 90.38,60.04 ; Rs25.2@81.6,68.5 83.4,68.5 83.95,67.95 OPTR13.4@83.95,66.47 90.38,60.04 ; Ds3.2@87.4,170.8 86.1,170.8 85.5,170.2 85.5,167.4 85,166.9 81.1,166.9 80,165.8 80,163.5 78.96,162.46 ; Rs5.2@87.9,153.5 86.1,153.5 85.5,154.1 OPTR3.4@85.5,155.56 82.56,158.5 80.5,158.5 79.6,159.4 79.6,161.82 78.96,162.46 ; Ks13.4@92,60.04 90.38,60.04 ; Ks4.4@95.5,162.46 97.46,162.46 ; Ds12.2@100,50.7 101.5,50.7 102.2,51.4 102.2,54.7 103.1,55.6 106.3,55.6 107.9,57.2 107.9,59.28 108.66,60.04 ; Rs23.2@100.1,68.5 101.4,68.5 102.4,67.5 OPTR12.4@102.4,66.44 102.4,66.3 108.66,60.04 ; Ds4.2@105.5,170.8 103.8,170.8 103.5,170.5 103.5,167.8 102.6,166.9 99.9,166.9 98.5,165.5 98.5,163.5 97.46,162.46 ; Rs7.2@105.9,153.5 104.3,153.5 103.5,154.3 OPTR4.4@103.5,155.56 102.04,155.56 99.5,158.1 99.5,160.42 97.46,162.46 ; Ks12.4@110.5,60.04 108.66,60.04 ; Ks5.4@114,162.46 115.44,162.46 ; Ds11.2@118.5,50.7 120.3,50.7 120.6,51 120.6,54.9 121.2,55.5 124.9,55.5 126.12,56.72 126.12,58.9 127.26,60.04 ; Rs21.2@118.6,69 120.3,69 120.95,68.35 OPTR11.4@120.95,66.97 123.8,64.12 123.8,63.5 127.26,60.04 ; Ds5.2@123.5,171.3 122,171.3 121.5,170.8 121.5,167.8 120.7,167 118.3,167 117,165.7 117,164.02 115.44,162.46 ; Rs9.2@124.4,154 122.8,154 122,154.8 OPTR5.4@122,156.06 121.84,156.06 115.44,162.46 ; Rs17.2@127.5,77.6 127.5,78.8 128.1,79.4 OPTR9.4@129.56,79.4 131.36,81.2 132.5,81.2 136.9,85.6 ; Rs15.2@127.5,119.6 127.5,121.2 128.25,121.95 OPTR8.4@129.53,121.95 131.18,123.6 132,123.6 136.96,128.56 ; Rs13.2@127.5,137.6 127.5,139.3 128.15,139.95 OPTR7.4@129.53,139.95 131.68,142.1 132.5,142.1 136.96,146.56 ; Ks11.4@129,60.04 127.26,60.04 ; Ks6.4@131.5,162.46 131.54,162.5 133.06,162.5 ; Ca1.2@132.8,110.2 Ca2.2@134.2,110.2 Ca3.2@135.6,110.2 Ca4.2@137,110.2 138.8,110.2 Ca5.1@139.2,110.6 ; Rs19.2@136.6,69 138.2,69 138.95,68.25 OPTR10.4@138.95,66.97 140.8,65.12 140.8,64.4 145.16,60.04 ; Ks9.4@136.96,87.5 136.9,87.44 136.9,85.6 ; Ks8.4@136.96,130 136.96,128.56 ; Ks7.4@136.96,148 136.96,146.56 ; Ds10.2@137.2,50.8 137.3,50.7 138.4,50.7 139,51.3 139,54.8 139.7,55.5 142.9,55.5 144.1,56.7 144.1,58.98 145.16,60.04 ; Ca5.1@139.3,110.7 v3(142.5,110.7) ; Ds6.2@141.5,171.3 140,171.3 139.5,170.8 139.5,167.5 138.9,166.9 135.1,166.9 134.3,166.1 134.3,163.74 133.06,162.5 ; Rs11.2@141.9,154 140.4,154 139.5,154.9 OPTR6.4@139.5,156.06 133.06,162.5 ; Ds9.2@145.9,77.5 145.9,78.9 145.4,79.4 142,79.4 141.4,80 141.4,83.6 140.4,84.6 137.9,84.6 136.9,85.6 ; Ds7.2@145.9,138 145.9,139.3 145.3,139.9 141.9,139.9 141.3,140.5 141.3,144.5 140.5,145.3 138.22,145.3 136.96,146.56 ; Ds8.2@146.4,120 146.4,121.3 145.7,122 141.8,122 141.5,122.3 141.5,125.5 140,127 138.52,127 136.96,128.56 ; Ks10.4@147,60.04 145.16,60.04
  Top Layer w0.762: Um1.4@50.85,97 Cm2.1@54.2,97
  Bottom Layer w0.254: Ks16.4@50.64,76.5 Ks16.4@50.7,76.5 ; 54.2,85 54.2,85.1 ; Ks14.4@73.16,60.04 Ks14.4@73.5,60.04 ; 79.52,160.36 79.6,160.36 ; 89.6,62.44 89.6,62.5 ; 97.6,160.36 97.7,160.36 ; 108.1,62.44 108.1,62.5 ; 116,160.36 116,160.46 ; 126.5,62.5 126.54,62.5 ; Ks11.4@129,60.04 Ks11.4@129.64,60.04 ; 134,127.1 134.06,127.1 ; 134,145 134,145.04
  Bottom Layer w0.508: Ks1.4@41.4,162.46 43.5,160.36 57.3,160.36 Ks2.4@59.4,162.46 61.5,160.36 75.32,160.36 Ks3.4@77.42,162.46 79.52,160.36 ; v2(42.9,97) 42.9,98.9 44,100 v3(54.2,100) ; Ks16.4@50.7,76.5 54.2,80 54.2,82.3 55.55,83.65 54.2,85 ; 54.2,85.1 v3(54.2,100) ; Ks15.4@55,60.04 57.46,62.5 70.7,62.5 Ks14.4@73.16,60.04 ; 55.6,83.6 59.1,83.6 60.4,82.3 64.54,82.3 PWR_CON.4@68,85.76 ; v1(61.4,131.8) 59.8,133.4 57.5,133.4 53.5,129.4 v1(53.5,123) 53.5,122.4 54.2,121.7 v3(54.2,100) ; Ks14.4@73.5,60.04 75.96,62.5 89.6,62.5 ; 79.6,160.36 93.4,160.36 Ks4.4@95.5,162.46 97.6,160.36 ; v1(85.6,84.6) 92.2,91.2 133.26,91.2 Ks9.4@136.96,87.5 ; 89.6,62.44 Ks13.4@92,60.04 94.46,62.5 108.1,62.5 ; 97.7,160.36 111.9,160.36 Ks5.4@114,162.46 116,160.46 ; 108.1,62.44 Ks12.4@110.5,60.04 112.96,62.5 126.5,62.5 ; 116,160.36 129.4,160.36 ; 126.54,62.5 Ks11.4@129,60.04 ; Ks11.4@129.64,60.04 133.5,63.9 ; Ks6.4@131.5,162.46 129.4,160.36 ; 134,127.1 134,120.6 142.5,112.1 v3(142.5,110.7) 142.5,109.6 141,108.1 141,96.1 139.2,94.3 139.2,89.74 Ks9.4@136.96,87.5 ; 134,145 134,132.96 Ks8.4@136.96,130 134.06,127.1 ; 134,145.04 Ks7.4@136.96,148 134,150.96 134,155.76 129.4,160.36 ; Ks10.4@147,60.04 144.54,62.5 134.9,62.5 133.5,63.9 ; 133.5,63.9 133.5,84.04 Ks9.4@136.96,87.5
AnaliserIN: Ks1.1 Ks2.1 Ks3.1 Ks4.1 Ks5.1 Ks6.1 Ks7.1 Ks8.1 Ks9.1 Ks10.1 Ks11.1 Ks12.1 Ks13.1 Ks14.1 Ks15.1 Ks16.1 Ra1.1 Ua1.5 | length 343.5
  Top Layer w0.254: Ks1.1@46.48,154.84 46.48,152.02 48.4,150.1 66.4,150.1 ; Ks15.1@55,67.66 55,70.9 56.6,72.5 63.1,72.5 ; Ks16.1@58.26,76.5 58.34,76.42 60.68,76.42 61.8,75.3 61.8,73.8 63.1,72.5 ; Ks2.1@64.48,154.84 64.48,152.02 66.4,150.1 ; Ks14.1@73.5,67.66 73.5,70.7 75.3,72.5 ; Ks3.1@82.5,154.84 82.5,152 84.4,150.1 ; Ks13.1@92,67.66 92,70.8 93.7,72.5 ; Ks4.1@100.58,154.84 100.58,152.02 102.5,150.1 ; Ks12.1@110.5,67.66 110.5,71.2 111.8,72.5 ; Ks5.1@119.08,154.84 119.08,152.02 121,150.1 ; 127.6,70.9 129,69.5 Ks11.1@129,67.66 ; Ua1.5@129.325,100 129.325,97.525 128.2,96.4 123.9,96.4 123.3,97 Ra1.1@123.3,97.6 121.9,97.6 ; Ks9.1@129.34,87.5 122.7,87.5 121,89.2 ; Ks8.1@129.34,124.92 126.52,124.92 124.6,123 ; Ks7.1@129.34,142.92 126.12,142.92 124.6,141.4 ; Ks6.1@131.5,154.84 124.6,147.94 ; Ks10.1@141.92,67.66 138.68,70.9 124.7,70.9 121,74.6 ; 63.1,72.5 75.3,72.5 ; 66.4,150.1 84.4,150.1 ; 75.3,72.5 93.7,72.5 ; 84.4,150.1 102.5,150.1 ; 93.7,72.5 111.8,72.5 ; 102.5,150.1 121,150.1 ; 111.8,72.5 118.9,72.5 121,74.6 ; 121,74.6 121,89.2 ; 121,89.2 121,96.7 121.9,97.6 ; 121,150.1 122.44,150.1 124.6,147.94 ; 121.9,97.6 121,98.5 121,111.4 124.6,115 124.6,123 ; 124.6,123 124.6,141.4 ; 124.6,141.4 124.6,147.94
AnaliserOUT: CON2_a1.1 Ua1.6 | length 23.1
  Top Layer w0.254: Ua1.6@129.975,100 129.975,97.925 131.5,96.4 140.4,96.4 141.2,97.2 141.2,101.7 142.5,103 CON2_a1.1@145,103
CS1: SPI_CON.5 U1.20 | length 12
  Top Layer w0.254: U1.20@81,122.4 81,130 81.9,130.9 83.9,130.9 83.92,130.88 SPI_CON.5@85,130.88